# EAGLE board MICRO_MODULAR - Copy (4) (EAGLE 7.5.0)
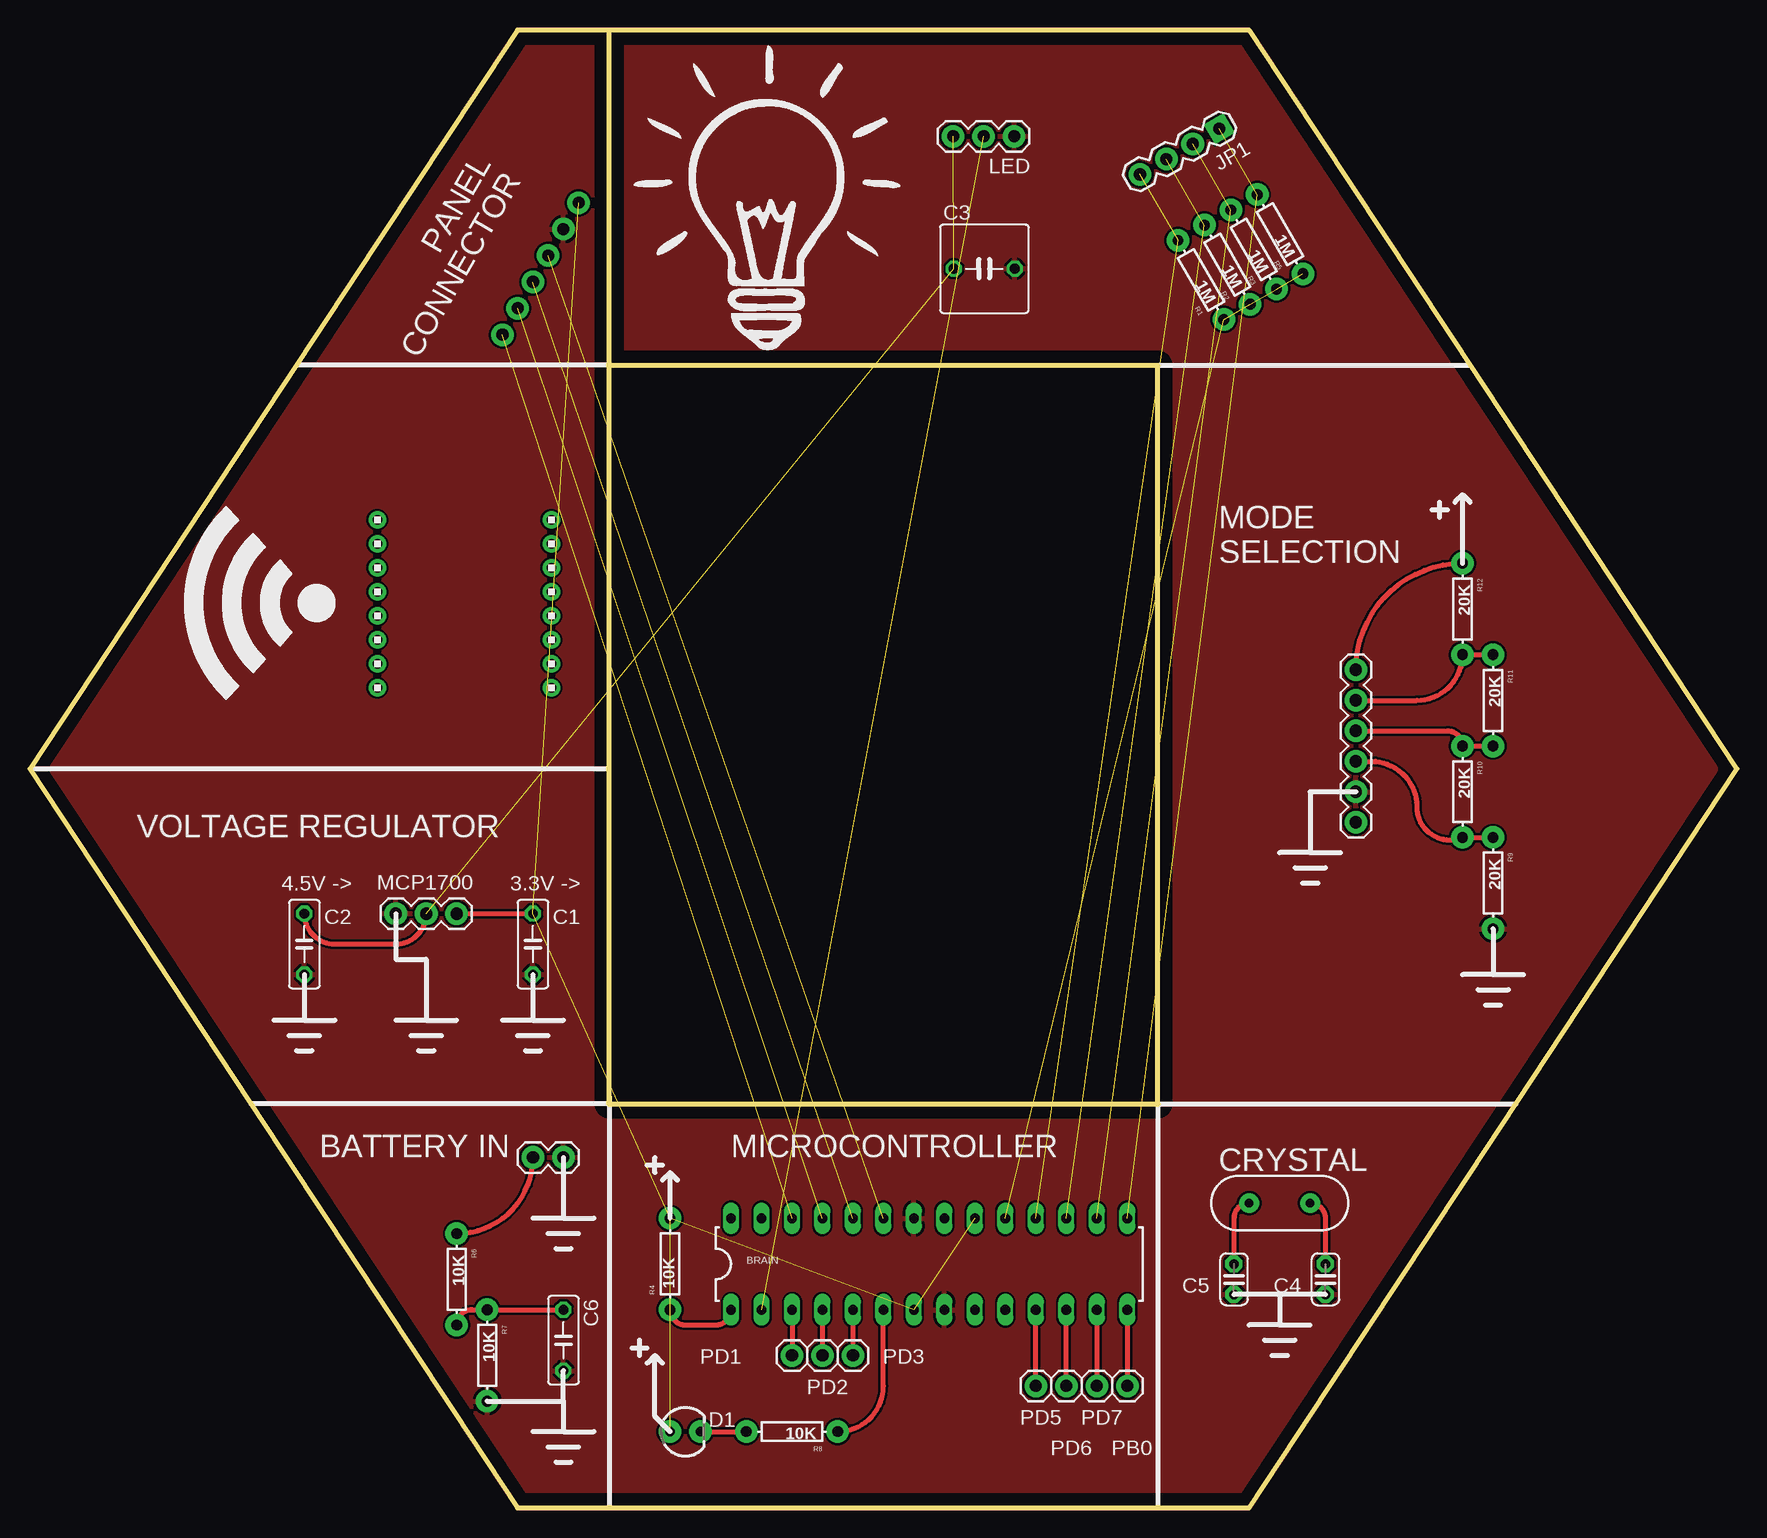
[diagram p0: board, top side]
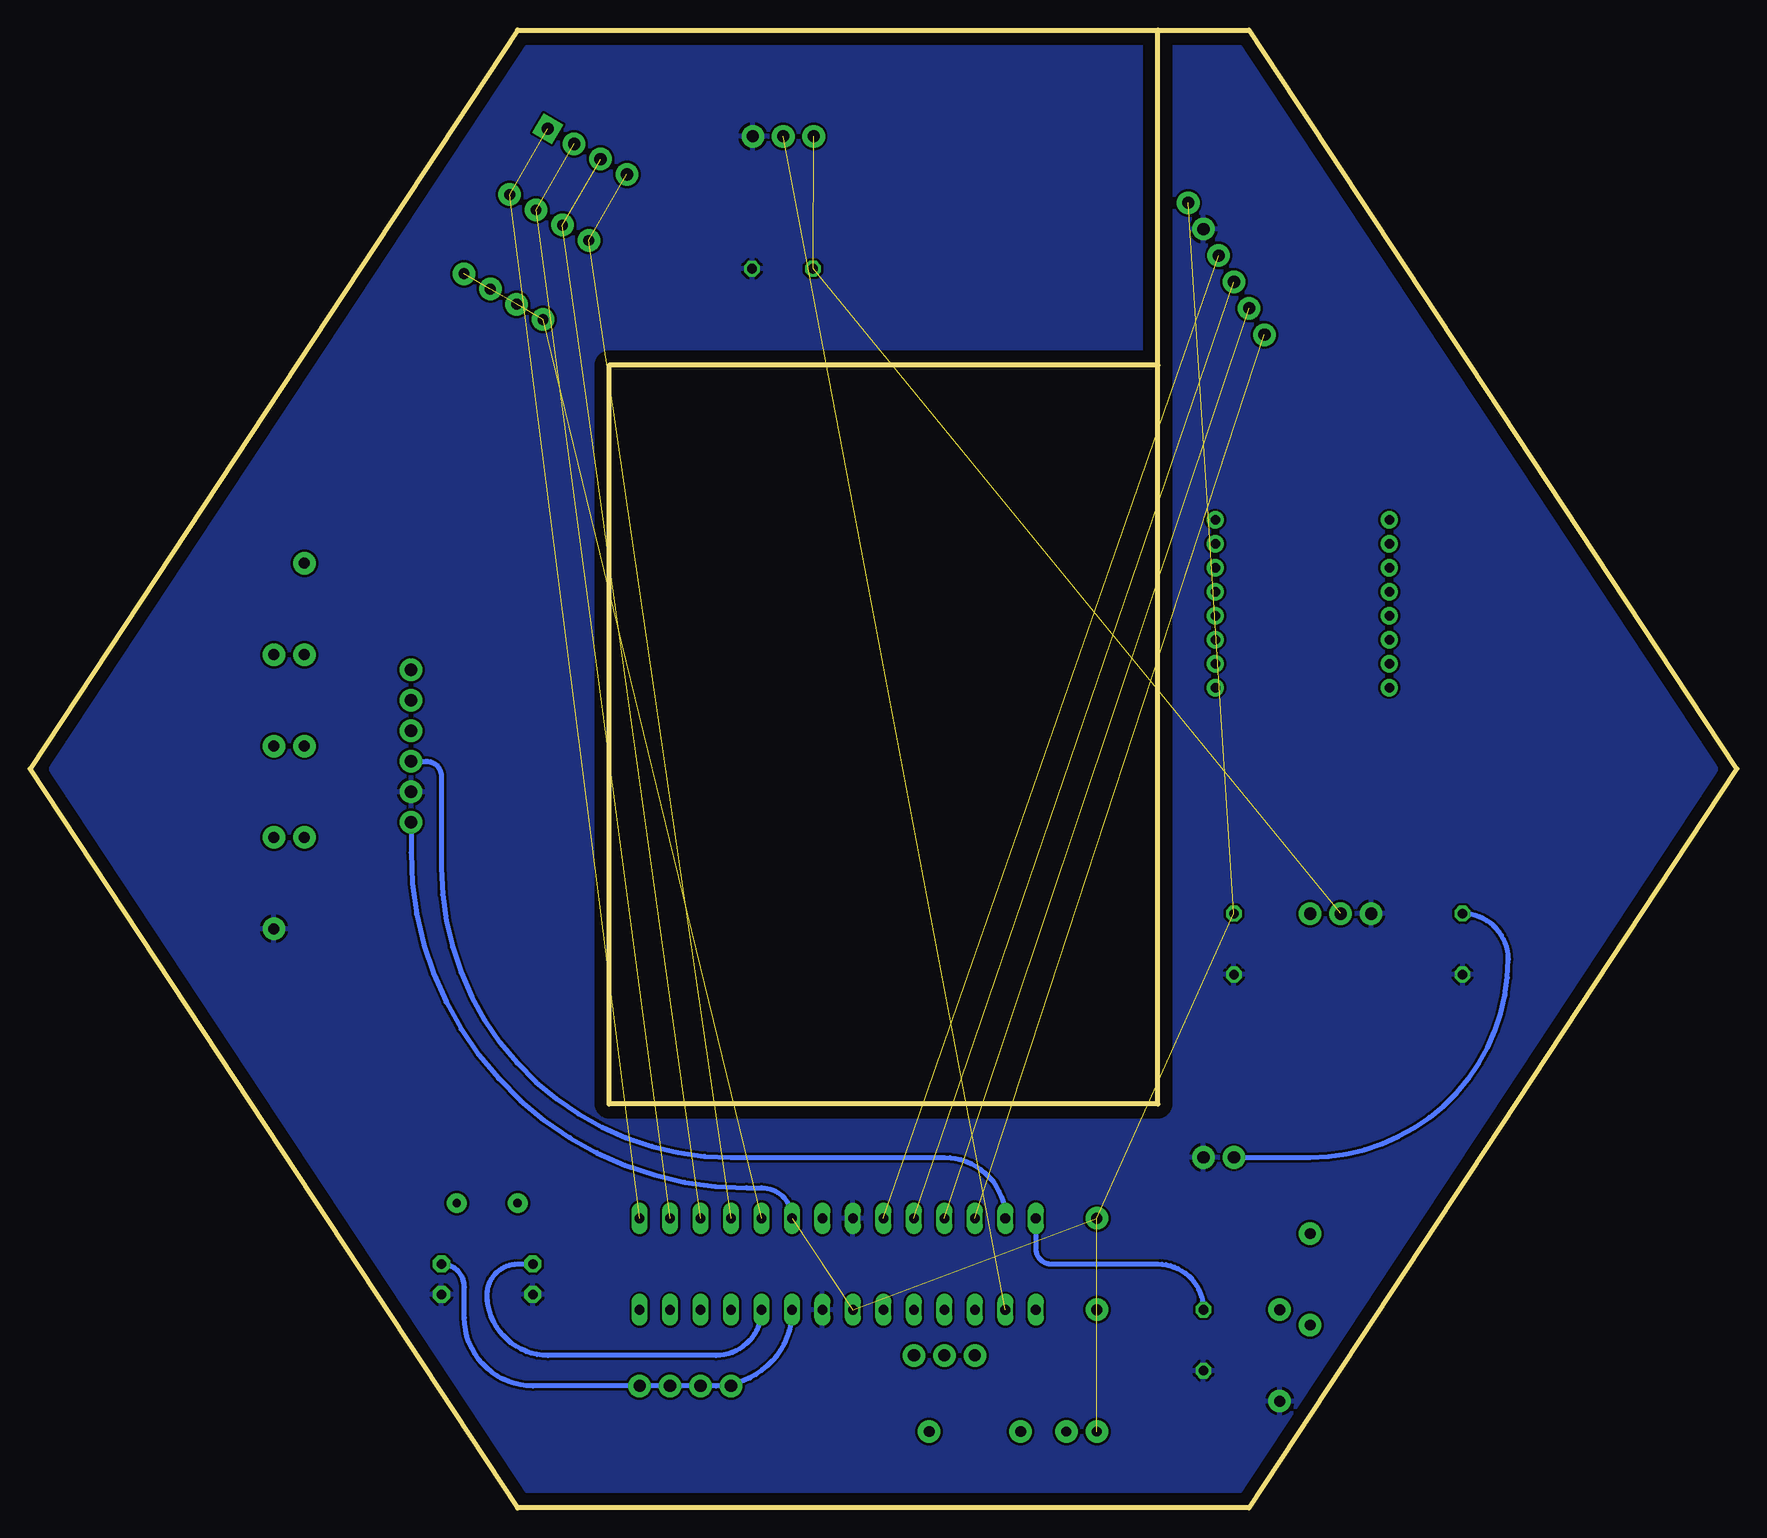
[diagram p1: board, bottom side, seen from below]

Size 142.24 x 123.19 mm. Coordinates in mm from the lower left corner, seen from the top.
Outline: 48.26,123.19 101.6,123.19 142.24,61.59 101.6,0 40.64,0 0,61.59 40.64,123.19 48.26,123.19
Outline: 48.26,95.25 48.26,33.66 93.98,33.66 93.98,95.25 48.26,95.25
Outline: 48.26,95.25 48.26,123.19
Copper layers (1*16): Top 0.035mm / dielectric 1.5mm / Bottom 0.035mm
Design rules "default": minimum track width 10mil, minimum drill 24mil, track to track 8mil, track to pad 8mil, pad to pad 8mil, via to via 8mil, smd to smd 8mil, copper to edge 40mil, drill to drill 8mil, minimum pad ring 10mil, minimum via ring 8mil, stop-mask expansion 4mil, vias tented up to drill 0mil, thermal gap 10mil
Net classes: 0 default: width 0.254 mm

## Footprints (pad centres in the part's own frame; a part is rotated, then mirrored left to right if it is on the bottom)
DIL-28-3 = drill 0.813 long: 1 -16.51,-3.81; 2 -13.97,-3.81; 3 -11.43,-3.81; 4 -8.89,-3.81; 5 -6.35,-3.81; 6 -3.81,-3.81; 7 -1.27,-3.81; 8 1.27,-3.81; 9 3.81,-3.81; 10 6.35,-3.81; 11 8.89,-3.81; 12 11.43,-3.81; 13 13.97,-3.81; 14 16.51,-3.81; 15 16.51,3.81; 16 13.97,3.81; 17 11.43,3.81; 18 8.89,3.81; 19 6.35,3.81; 20 3.81,3.81; 21 1.27,3.81; 22 -1.27,3.81; 23 -3.81,3.81; 24 -6.35,3.81; 25 -8.89,3.81; 26 -11.43,3.81; 27 -13.97,3.81; 28 -16.51,3.81
C050-025X075 = drill 0.813 octagon: 1 -2.54,0; 2 2.54,0
C050-075X075 = drill 0.813 octagon: 1 -2.54,0; 2 2.54,0
C025-024X044 = drill 0.813 pad 1.422 octagon: 1 -1.27,0; 2 1.27,0
HC49US = drill 0.7 pad 1.651: 1 -2.54,0; 2 2.54,0
LED3MM = drill 0.813 pad 1.88: A -1.27,0; K 1.27,0
1X8 = drill 0.8 pad 1.422: 1 -7,0; 2 -5,0; 3 -3,0; 4 -1,0; 5 1,0; 6 3,0; 7 5,0; 8 7,0
1X04 = drill 1.016 pad 1.88 square: 1 0,0 | drill 1.016 pad 1.88: 2 2.54,0; 3 5.08,0; 4 7.62,0
1X03 = drill 1.016 pad 1.88: 1 0,0; 2 2.54,0; 3 5.08,0
1X06 = drill 1.016 pad 1.88: 1 0,0; 2 2.54,0; 3 5.08,0; 4 7.62,0; 5 10.16,0; 6 12.7,0
1X02 = drill 1.016 pad 1.88: 1 0,0; 2 2.54,0
1X06_NO_SILK = drill 1.016 pad 1.88: 1 0,0; 2 2.54,0; 3 5.08,0; 4 7.62,0; 5 10.16,0; 6 12.7,0
1X01 = drill 1.016 pad 1.88: 1 0,0
AXIAL-0.3 = drill 0.9 pad 1.88: P$1 -3.81,0; P$2 3.81,0

## Placement (x,y rotation side)
BRAIN  ATMEGA328P_PDIP  [DIL-28-3]  74.93,20.32 0 top
C1  1uF  [C050-025X075]  41.91,46.99 270 top
C2  1uF  [C050-025X075]  22.86,46.99 270 top
C3  1000uF  [C050-075X075]  79.53,103.29 0 top
C4  22pF  [C025-024X044]  107.95,19.05 270 top
C5  22pF  [C025-024X044]  100.33,19.05 270 top
C6  1u  [C050-025X075]  44.45,13.97 270 top
CRYSTAL  [HC49US]  104.14,25.4 0 top
D1  [LED3MM]  54.61,6.35 0 top
J1  1X8  [1X8]  28.96,75.36 90 top
J2  1X8  [1X8]  43.46,75.36 90 top
JP1  [1X04]  99.1,114.96 210 top
LED  [1X03]  82.01,114.33 180 top
MCP1700  [1X03]  35.56,49.53 180 top
MODE  [1X06]  110.49,57.15 90 top
ON_OFF  [1X02]  44.45,29.21 180 top
PANEL  [1X06_NO_SILK]  39.37,97.79 60 top
PB0  [1X01]  91.44,10.16 0 top
PD1  [1X01]  63.5,12.7 0 top
PD2  [1X01]  66.04,12.7 0 top
PD3  [1X01]  68.58,12.7 0 top
PD5  [1X01]  83.82,10.16 0 top
PD6  [1X01]  86.36,10.16 0 top
PD7  [1X01]  88.9,10.16 0 top
R1  1M  [AXIAL-0.3]  97.58,102.36 120 top
R2  1M  [AXIAL-0.3]  99.78,103.63 120 top
R3  1M  [AXIAL-0.3]  101.98,104.9 120 top
R4  10K  [AXIAL-0.3]  53.34,20.32 90 top
R5  1M  [AXIAL-0.3]  104.18,106.17 120 top
R6  10K  [AXIAL-0.3]  35.56,19.05 270 top
R7  10K  [AXIAL-0.3]  38.1,12.7 270 top
R8  10K  [AXIAL-0.3]  63.5,6.35 180 top
R9  20K  [AXIAL-0.3]  121.92,52.07 270 top
R10  20K  [AXIAL-0.3]  119.38,59.69 270 top
R11  20K  [AXIAL-0.3]  121.92,67.31 270 top
R12  20K  [AXIAL-0.3]  119.38,74.93 270 top

## Library data of the parts
BRAIN J1 J2 = RodrigoMarques_Parts
C1-C6 = adafruit
CRYSTAL = SparkFun-FreqCtrl
D1 = SparkFun-LED
JP1 LED MCP1700 ON_OFF PB0 PD1-PD3 PD5-PD7 = SparkFun-Connectors
MODE PANEL = SparkFun-Connectors; PROD_ID: CONN-08437
R1-R12 = SparkFun-Passives

## Nets
BLUE_BRAIN: BRAIN.25 PANEL.2
GND: BRAIN.8 BRAIN.22 C1.2 C2.2 C3.2 C4.2 C5.2 C6.2 LED.1 MCP1700.3 MODE.2 ON_OFF.1 PANEL.5 R7.P$2 R9.P$2
GREEN_BRAIN: BRAIN.24 PANEL.3
LEDS_BRAIN: BRAIN.2 LED.2
N$1: BRAIN.28 C6.1 R6.P$2 R7.P$1
N$2: BRAIN.15 JP1.1 R5.P$2
N$3: BRAIN.16 JP1.2 R3.P$2
N$4: BRAIN.17 JP1.3 R2.P$2
N$5: BRAIN.18 JP1.4 R1.P$2
N$6: BRAIN.19 R1.P$1 R2.P$1 R3.P$1 R5.P$1
N$7: BRAIN.9 C4.1 CRYSTAL.2
N$8: BRAIN.10 C5.1 CRYSTAL.1
N$9: BRAIN.5 PD3.1
N$10: D1.K R8.P$2
N$11: BRAIN.6 R8.P$1
N$12: BRAIN.4 PD2.1
N$13: BRAIN.27 MODE.3 R9.P$1 R10.P$2
N$14: BRAIN.12 PD6.1
N$15: BRAIN.13 PD7.1
N$16: BRAIN.14 PB0.1
N$17: BRAIN.3 PD1.1
N$18: BRAIN.11 PD5.1
N$19: MODE.6 R12.P$1
N$20: MODE.5 R11.P$1 R12.P$2
N$21: MODE.4 R10.P$1 R11.P$2
RED_BRAIN: BRAIN.26 PANEL.1
RST: BRAIN.1 R4.P$1
SPEED_BRAIN: BRAIN.23 PANEL.4
SWITCH_BRAIN: C2.1 C3.1 LED.3 MCP1700.2 ON_OFF.2 R6.P$1
V_5V: BRAIN.7 BRAIN.20 C1.1 D1.A MCP1700.1 MODE.1 PANEL.6 R4.P$2

## Tracks (layer width: path | path; a pad name or v marks a point on that pad's centre or on a via)
BLUE_BRAIN  (1 unrouted)
GND
  pour Top: -12.7,130.81 -12.7,-3.81 181.61,-3.81 181.61,130.81
  pour Bottom: -6.35,132.08 -6.35,-7.62 160.02,-7.62 160.02,132.08
GREEN_BRAIN  (1 unrouted)
LEDS_BRAIN  (1 unrouted)
N$1
  Top 0.406: R6.P$2 arc-90 36.83,16.51 R7.P$1 C6.1
  Bottom 0.406: BRAIN.28 58.42,21.59 arc-90 57.15,20.32 48.26,20.32 arc90 C6.1
N$2  (2 unrouted)
N$3  (2 unrouted)
N$4  (2 unrouted)
N$5  (2 unrouted)
N$6  (4 unrouted)
N$7
  Top 0.406: CRYSTAL.2 arc-90 107.95,24.13 C4.1
  Bottom 0.406: BRAIN.9 arc90 85.09,10.16 100.33,10.16 arc90 106.05,15.88 106.05,18.41 arc-90 C4.1
N$8
  Top 0.406: CRYSTAL.1 arc90 100.33,24.13 C5.1
  Bottom 0.406: BRAIN.10 arc90 85.09,12.7 99.06,12.7 arc90 104.14,17.78 arc90 101.6,20.32 C5.1
N$9
  Top 0.406: BRAIN.5 PD3.1
N$10
  Top 0.406: D1.K R8.P$2
N$11
  Top 0.406: R8.P$1 arc90 71.12,10.16 BRAIN.6
N$12
  Top 0.406: BRAIN.4 PD2.1
N$13
  Top 0.406: R9.P$1 R10.P$2 arc-113 115.57,58.42 arc90 111.76,62.23 MODE.3
  Bottom 0.406: MODE.3 109.22,62.23 arc90 107.95,60.96 107.95,53.34 arc-90 83.82,29.21 66.04,29.21 arc90 BRAIN.27
N$14
  Top 0.406: PD6.1 BRAIN.12
N$15
  Top 0.406: BRAIN.13 PD7.1
N$16
  Top 0.406: BRAIN.14 PB0.1
N$17
  Top 0.406: BRAIN.3 PD1.1
N$18
  Top 0.406: PD5.1 BRAIN.11
N$19
  Top 0.406: MODE.6 arc-90 R12.P$1
N$20
  Top 0.406: R11.P$1 R12.P$2 arc-90 115.57,67.31 MODE.5
N$21
  Top 0.406: R11.P$2 R10.P$1 arc90 118.11,64.77 MODE.4
RED_BRAIN  (1 unrouted)
RST
  Top 0.406: R4.P$1 arc90 54.61,15.24 57.15,15.24 arc90 BRAIN.1
SPEED_BRAIN  (1 unrouted)
SWITCH_BRAIN  (2 unrouted)
  Top 0.406: C2.1 arc90 25.4,46.99 30.48,46.99 arc90 MCP1700.2 | R6.P$1 arc90 ON_OFF.2
  Bottom 0.406: ON_OFF.2 35.56,29.21 arc-90 19.05,45.72 arc-90 C2.1
V_5V  (5 unrouted)
  Top 0.406: MCP1700.1 C1.1
  Bottom 0.406: MODE.1 110.49,54.61 arc-90 82.55,26.67 81.28,26.67 arc90 BRAIN.20

## Text on the board
tPlace: PANEL / CONNECTOR | MODE / SELECTION | VOLTAGE REGULATOR | 4.5V -> | 3.3V -> | BATTERY IN | MICROCONTROLLER